# Altium PCB Arm_control_pull.PcbDoc
Units mm, origin at the board's own origin, x right, y up, seen from the top; angles counter-clockwise.
Board outline 234.6 x 140 mm, 2 copper layers (Top Layer, Bottom Layer); 37 components, 45 nets, 285 pads, 23 vias.
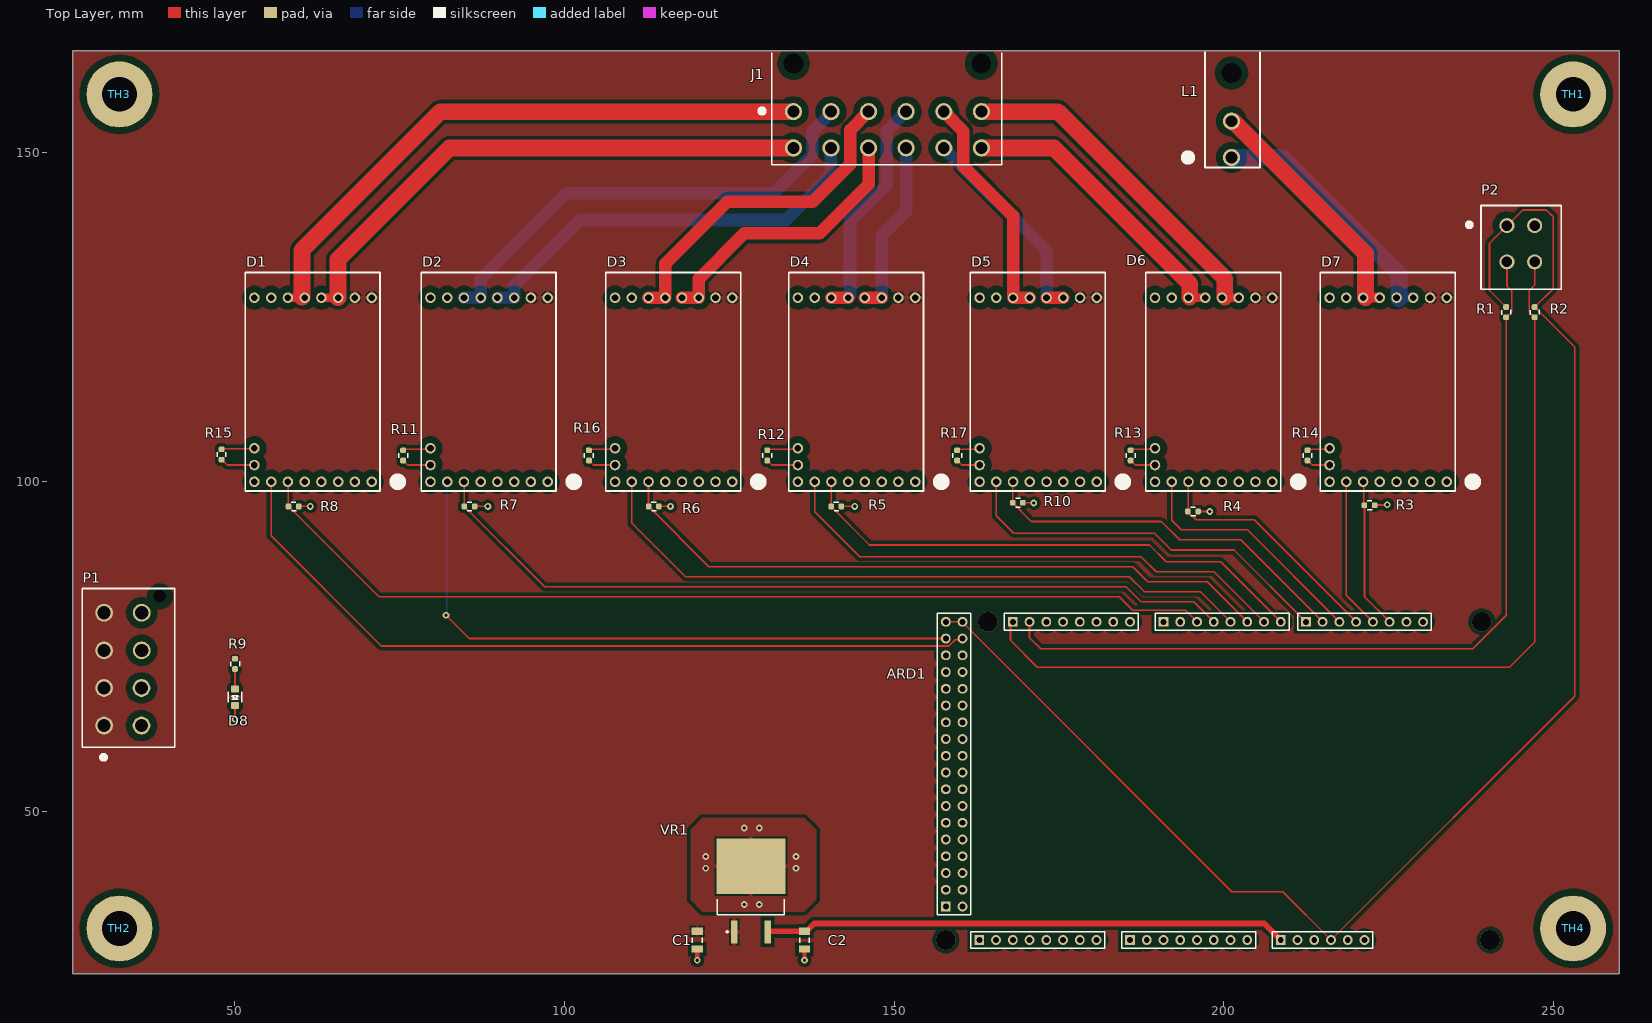
[diagram p0: Top Layer view]
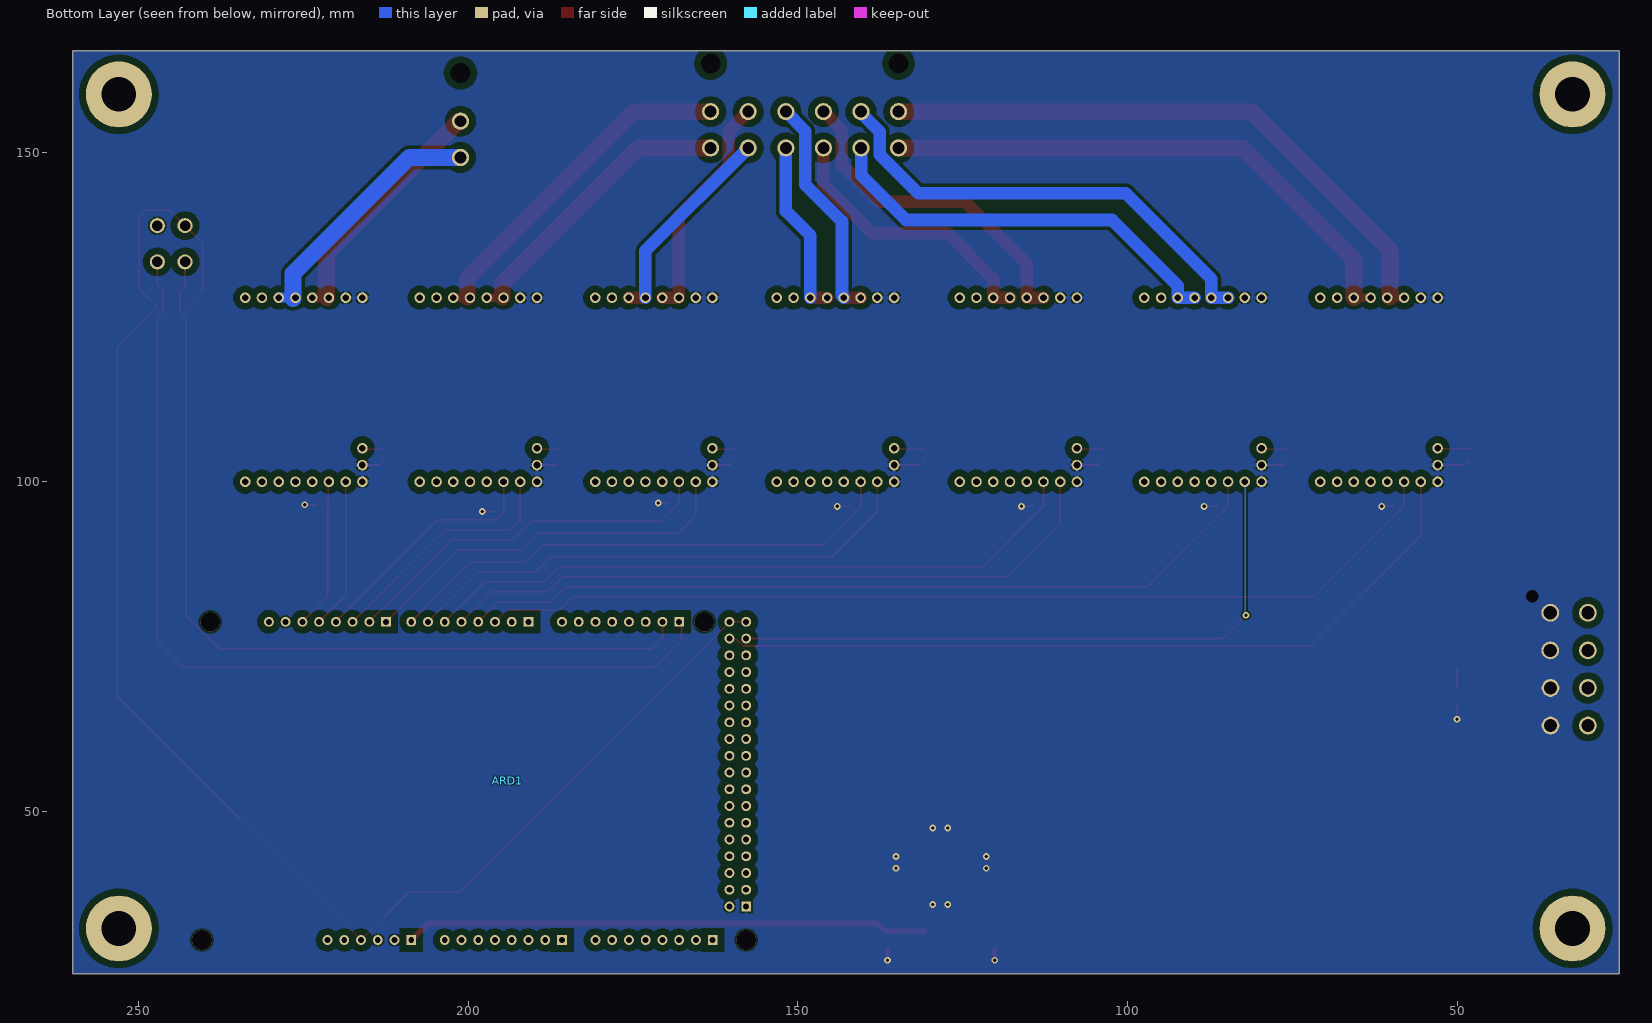
[diagram p1: Bottom Layer view, seen from below]

## Layer stack, top to bottom
Top Solder: solder mask 0.0102, Solder Resist, Dk 3.5
Top Layer: signal copper 0.0356
Dielectric 1: dielectric 0.32, FR-4, Dk 4.8
Bottom Layer: signal copper 0.0356
Bottom Solder: solder mask 0.0102, Solder Resist, Dk 3.5

## Board outline
25.4,25.4 25.4,165.4 260,165.4 260,25.4

## Design rules (kind name [scope] priority, off if disabled: settings)
BoardOutlineClearance [All] p1: gap=0.254 ignorepadtopadclearanceinfootprint=FALSE except(0: Arc-SplitContinuation Track-SplitContinuation SMDPad-SplitContinuation THPad-SplitContinuation Via-SplitContinuation Fill-SplitContinuation Poly-SplitContinuation Region-SplitContinuation Text-SplitContinuation; 0.127: Track-OutlineEdge SMDPad-OutlineEdge THPad-OutlineEdge Via-OutlineEdge Fill-OutlineEdge Poly-OutlineEdge Region-OutlineEdge Text-OutlineEdge)
Clearance 14.8VP_CLearance [InNet('14.8V') or InNet('OutA1') or  InNet('OutA2') or InNet('OutA3') or InNet('OutA4') or InNet('OutA5') or InNet('OutA6') or InNet('OutA7') or InNet('OutB1') or  InNet('OutB2') or InNet('OutB3') or InNet('OutB4') or InNet('OutB5') or InNet('OutB6') or InNet('OutB7')] p1: gap=0.508 ignorepadtopadclearanceinfootprint=TRUE except(0: Arc-Hole Track-Hole SMDPad-Hole THPad-Hole Via-Hole Fill-Hole Poly-Hole Region-Hole Text-Hole; 1.016: THPad-Poly)
Clearance [All] p2: gap=0.254 ignorepadtopadclearanceinfootprint=FALSE except(0: Arc-Hole Track-Hole SMDPad-Hole THPad-Hole Via-Hole Fill-Hole Poly-Hole Region-Hole Text-Hole; 1.016: THPad-Poly)
HoleSize [All] p1: absolutevalues=TRUE maxlimit=25.4 minlimit=0.025 maxpercent=80.000 minpercent=20.000
PolygonConnect Direct_Connect [InComponent('P1')] p1: connectstyle=Direct reliefconductorwidth=0.254 reliefentries=4 polygonreliefangle="90 Angle" airgapwidth=0.254
PolygonConnect Thick_Connect [InComponent('D1') or  InComponent('D2') or InComponent('D3') or InComponent('D4') or InComponent('D5') or InComponent('D6') or InComponent('D7') or InComponent('VR1')] p2: thpad.connectstyle=Relief thpad.reliefconductorwidth=0.635 thpad.reliefentries=4 thpad.polygonreliefangle="90 Angle" thpad.airgapwidth=0.254 smdpad.connectstyle=Relief smdpad.reliefconductorwidth=0.635 smdpad.reliefentries=4 smdpad.polygonreliefangle="90 Angle" smdpad.airgapwidth=0.254 via.connectstyle=Direct via.reliefconductorwidth=0.254 via.reliefentries=4 via.polygonreliefangle="90 Angle" via.airgapwidth=0.254
PolygonConnect [All] p3: thpad.connectstyle=Relief thpad.reliefconductorwidth=0.254 thpad.reliefentries=4 thpad.polygonreliefangle="90 Angle" thpad.airgapwidth=0.254 smdpad.connectstyle=Relief smdpad.reliefconductorwidth=0.254 smdpad.reliefentries=4 smdpad.polygonreliefangle="90 Angle" smdpad.airgapwidth=0.254 via.connectstyle=Direct via.reliefconductorwidth=0.254 via.reliefentries=4 via.polygonreliefangle="90 Angle" via.airgapwidth=0.254
RoutingVias [All] p1: holewidth=0.508 width=1.016 viastyle="Through Hole" minholewidth=0.381 minwidth=0.508 maxholewidth=1.27 maxwidth=1.524
SilkToSolderMaskClearance [IsPad] p1: minsilkscreentomaskgap=0.025 clearancetoexposedcopper=TRUE
SolderMaskExpansion [All] p1: expansion=0.102
Width [All] p1: maxlimit=2.54 minlimit=0.203 preferedwidth=0.254 minimp=50.000000 maximp=50.000000 favimp=50.000000
28 further rules are at their usual default settings.

## Classes and differential pairs
component class Arm_control_pull: D1 D2 D3 D4 D5 D6 D7 D8 J1 J? L1 M1 M2 M3 M4 M5 M6 M7 P1 R9 R11 R12 R13 R14 R15 R16 R17
component class ARD: ARD1 C1 C2 K? P2 R1 R2 R3 R4 R5 R6 R7 R8 R10 TH1 TH2 TH3 TH4 VR1

## Components (designator, comment, footprint, x,y, rotation, side; value= is the part's Value field where it differs from the comment)
ARD1 "Arduino Mega" "Arduino Mega" 201.016,55.905 r180 bottom
C1 "Cap Semi" C1206 120.142,30.48 r90 top value=100pF
C2 "Cap Semi" C1206 136.398,30.48 r90 top value=100pF
D1 "Pololu G2 High-Power Motor Driver 18v25" "POLOLU 18V25" 70.764,100 r180 top
D2 "Pololu G2 High-Power Motor Driver 18v25" "POLOLU 18V25" 97.46,100 r180 top
D3 "Pololu G2 High-Power Motor Driver 18v25" "POLOLU 18V25" 125.451,100 r180 top
D4 "Pololu G2 High-Power Motor Driver 18v25" "POLOLU 18V25" 153.187,100 r180 top
D5 "Pololu G2 High-Power Motor Driver 18v25" "POLOLU 18V25" 180.734,100 r180 top
D6 "Pololu G2 High-Power Motor Driver 18v25" "POLOLU 18V25" 207.341,100 r180 top
D7 "Pololu G2 High-Power Motor Driver 18v25" "POLOLU 18V25" 233.815,100 r180 top
D8 "Blue LED" LTST-C171TBKT 50.038,68.58 r270 top
J1 "172064-1012" 172064-1012 163.226,150.634 r180 top
L1 "0768250002" "MOLEX 0768250002" 201.168,149.186 r180 top
P1 "Mini-Fit Jr 8 Pos RA" "MOLEX 172065-0208" 34.417,72.822 r270 top
P2 "Mini-Fit Jr 4 Pos" "MOLEX 0039281043" 242.942,138.85 r0 top
R1 "Res1" RESC1608X06N_0603 242.824,125.73 r90 top value=4.7K
R2 "Res1" RESC1608X06N_0603 247.142,125.73 r90 top value=4.7K
R3 "Res1" RESC1608X06N_0603 222.098,96.444 r180 top value=1K
R4 "Res1" RESC1608X06N_0603 195.326,95.504 r180 top value=1K
R5 "Res1" RESC1608X06N_0603 141.224,96.266 r180 top value=1K
R6 "Res1" RESC1608X06N_0603 113.538,96.266 r180 top value=1K
R7 "Res1" RESC1608X06N_0603 85.598,96.266 r180 top value=1K
R8 "Res1" RESC1608X06N_0603 58.928,96.266 r180 top value=1K
R9 "Res1" RESC1608X06N_0603 50.038,72.377 r270 top value=2.7k
R10 "Res1" RESC1608X06N_0603 168.758,96.825 r180 top value=1K
R11 "Res1" RESC1608X06N_0603 75.54,104 r90 top value=50K
R12 "Res1" RESC1608X06N_0603 130.759,104 r90 top value=50K
R13 "Res1" RESC1608X06N_0603 185.877,104 r90 top value=50K
R14 "Res1" RESC1608X06N_0603 212.7,104 r90 top value=50K
R15 "Res1" RESC1608X06N_0603 48.006,104.14 r90 top value=50K
R16 "Res1" RESC1608X06N_0603 103.708,104 r90 top value=50K
R17 "Res1" RESC1608X06N_0603 159.563,104 r90 top value=50K
TH1 "M5-Screw-Hole" M5_Screw_Hole#1 252.984,158.75 r0 top
TH2 "M5-Screw-Hole" M5_Screw_Hole#2 32.512,32.004 r0 top
TH3 "M5-Screw-Hole" M5_Screw_Hole#3 32.766,158.75 r0 top
TH4 "M5-Screw-Hole" M5_Screw_Hole#1 252.984,32.258 r0 top
VR1 "Volt Reg" DPAK254P1420X457-3N 128.27,37.85 r90 top

## Footprints (in the part's own frame and the unit in brackets; to place one, negate y for a bottom-side part, rotate by r counter-clockwise, add the part's x,y. Pads: shape width x height; smd on the part's side, far side on the other; paste and mask are expansions set on the pad)
172064-1012 [mm] "Connector Header Through Hole, Right Angle 12 position 0.224\" (5.70mm)"
  round 2.6 hole 1.8: 1(28.5,-5.5) 2(22.8,-5.5) 3(17.1,-5.5) 4(11.4,-5.5) 5(5.7,-5.5) 6(0,-5.5) 7(28.5,0) 8(22.8,0) 9(17.1,0) 10(11.4,0) 11(5.7,0) 12(0,0)
  round 2.6 hole 3 unplated: M1(0,-12.8) M1(28.5,-12.8)
  silkscreen extent -3.11,-14.47 33.53,2.54, body extent -3.11,-21.39 31.75,0.57, height 14.55
"Arduino Mega" [mm] "Arduino Mega 2560"
  rect 1.5x1.5 hole 0.9: 0(10.16,22.86) 8(-11.43,22.86) 21(33.02,22.86) 59(-7.62,-25.4) 67(15.24,-25.4) 75(38.1,-25.4) 79(43.18,-20.32)
  round 1.5 hole 0.9: 1(7.62,22.86) 2(5.08,22.86) 3(2.54,22.86) 4(0,22.86) 5(-2.54,22.86) 6(-5.08,22.86) 7(-7.62,22.86) 9(-13.97,22.86) 10(-16.51,22.86) 11(-19.05,22.86) 12(-21.59,22.86) 13(-24.13,22.86) 14(15.24,22.86) 15(17.78,22.86) 16(20.32,22.86) 17(22.86,22.86) 18(25.4,22.86) 19(27.94,22.86) 20(30.48,22.86) 22(40.64,20.32) 23(43.18,20.32) 24(40.64,17.78) 25(43.18,17.78) 26(40.64,15.24) 27(43.18,15.24) 28(40.64,12.7) 29(43.18,12.7) 30(40.64,10.16) 31(43.18,10.16) 32(40.64,7.62) 33(43.18,7.62) 34(40.64,5.08) 35(43.18,5.08) 36(40.64,2.54) 37(43.18,2.54) 38(40.64,0) 39(43.18,0) 40(40.64,-2.54) 41(43.18,-2.54) 42(40.64,-5.08) 43(43.18,-5.08) 44(40.64,-7.62) 45(43.18,-7.62) 46(40.64,-10.16) 47(43.18,-10.16) 48(40.64,-12.7) 49(43.18,-12.7) 50(40.64,-15.24) 51(43.18,-15.24) 52(40.64,-17.78) 53(43.18,-17.78) 54(-20.32,-25.4) 55(-17.78,-25.4) 56(-15.24,-25.4) 57(-12.7,-25.4) 58(-10.16,-25.4) 60(-2.54,-25.4) 61(0,-25.4) 62(2.54,-25.4) 63(5.08,-25.4) 64(7.62,-25.4) 65(10.16,-25.4) 66(12.7,-25.4) 68(20.32,-25.4) 69(22.86,-25.4) 70(25.4,-25.4) 71(27.94,-25.4) 72(30.48,-25.4) 73(33.02,-25.4) 74(35.56,-25.4) 76(-26.67,22.86) 77(-29.21,22.86) 78(40.64,-20.32) 80(43.18,22.86) 81(40.64,22.86)
C1206 [mm] "Chip Capacitor, Body 3.2x1.6mm, IPC High Density"
  rect 1.1x1.7 smd: 1(-1.35,0) 2(1.35,0)
  silkscreen extent -0.4,-0.75 0.4,0.75, body extent -1.7,-0.9 1.7,0.9, height 1.3
DPAK254P1420X457-3N [mm] "D2-PAK, 3-Pads, Body 7.77x8.48mm (max), IPC Medium Density"
  rect 3.504x1 smd: 1(-6.1,2.54) 3(-6.1,-2.54)
  rect 8.38x10.49 smd: 2(3.85,0)
  silkscreen extent -6.22,-5.1 -1.14,5.1, body extent -6.71,-5.13 7.48,5.13, height 4.83
LTST-C171TBKT [mm]
  rrect50% 1.1x1.25 smd paste+0: 1(0,0) 2(2.5,0)
  silkscreen extent 0.46,-1.02 1.98,1.02
M5_Screw_Hole#1 [mm]
  round 10 hole 5.25 mask+0.2: 1(0,0)
M5_Screw_Hole#2 [mm]
  round 10 hole 5.25 mask+0.2: 1(0,0.254)
M5_Screw_Hole#3 [mm]
  round 10 hole 5.25 mask+0.2: 1(-0.254,0)
"MOLEX 172065-0208" [mm] "Connector Header Through Hole 8 position 0.224\" (5.70mm)"
  round 2.7 hole 2: 1(9.79,-4.236) 2(4.09,-4.236) 3(-1.61,-4.236) 4(-7.31,-4.236) 5(9.79,1.439) 6(4.09,1.439) 7(-1.61,1.464) 8(-7.31,1.464)
  round 0 hole 1.9: 6(-9.79,4.236)
  silkscreen extent -10.98,-7.56 14.97,6.49, body extent -10.5,-7.54 12.96,6.49, height 15.61
"MOLEX 0039281043" [mm] "Connector Header Through Hole 4 position 0.165\" (4.20mm)"
  round 2.3 hole 1.6: 1(0,0) 2(4.2,0) 3(0,-5.5) 4(4.2,-5.5)
  silkscreen extent -6.08,-9.65 8.25,3.05, body extent -3.07,-8.82 7.33,2.18, height 3.5
"MOLEX 0768250002" [mm]
  round 2.6 hole 1.8: 1(0,0) 2(0,-5.5)
  round 2.6 hole 3: ""(0,-12.8)
  silkscreen extent -4.32,-15.91 7.11,1.52, body extent -4.32,-21.39 4.03,0.57, height 14.05
"POLOLU 18V25" [mm]
  round 1.6 hole 1 paste+0: 1(17.78,0) 2(15.24,0) 3(12.7,0) 5(7.62,0) 6(5.08,0) 7(2.54,0) 10(17.78,-5.08) 11(15.24,-27.92) 11(17.78,-27.92) 12(12.7,-27.92) 13(5.08,-27.92) 13(7.62,-27.92) 14(2.54,-27.92)
  round 1.6 hole 1: 4(10.16,0) 8(0,0) 9(17.78,-2.54) 12(10.16,-27.92) 14(0,-27.92)
  silkscreen extent -4.12,-31.75 19.18,1.4, body extent -1.27,-31.72 19.05,1.3, height 9.57
RESC1608X06N_0603 [mm] "Chip Resistor, 2-Leads, Body 1.60x0.80mm, IPC Medium Density"
  rrect50% 0.85x0.9 smd: 1(-0.775,0) 2(0.775,0)
  silkscreen extent -0.38,-0.66 0.34,0.69, body extent -0.85,-0.45 0.85,0.45, height 0.55

## Part data
C1 C2: "Capacitor (Semiconductor SIM Model)", LatestRevisionDate=29-May-2009, LatestRevisionNote="IPC-7351 Footprint Added.", PackageDescription="Chip Capacitor", PackageReference=C1206, Published=8-Jun-2000, Publisher="Altium Limited"
J1: "Conn Shrouded Header HDR 12 POS 5.7mm Solder RA Thru-Hole Tray", Color=Black, Manufacturer 1="Molex Waldom", Max Operating Temperature=120°C, Min Operating Temperature=-40°C, Supplier Part Number 1=WM11214-ND, Category=Connectors, ComponentLink1Description=http://www.molex.com/pdm_docs/ps/PS-76823-100.pdf?src-supplier=Digi-Key, ComponentLink1URL=http://www.molex.com/pdm_docs/ps/PS-76823-100.pdf?src-supplier=Digi-Key, ComponentLink2Description=http://www.molex.com/pdm_docs/sd/1720641004_sd.pdf?src-supplier=Avnet, ComponentLink2URL=http://www.molex.com/pdm_docs/sd/1720641004_sd.pdf?src-supplier=Avnet, Connector Type="Male Pin", Contact Plating=Gold, Fastening Type=Ramp, Glow Wire Compliant=Compliant, Halogen Free="Low Halogen", Manufacturer Part Number 1=172064-1012, Mount="Through Hole", Number of Circuits=12, Number of Contacts=12, Number of Positions=12, Number of Rows=2, Orientation="Right Angle", Packaging=Tray, Pitch=5.7mm, Pricing 1="1=16.34000, 10=14.85400, 100=12.62590, 500=10.76916, 1000=9.87791 (USD)", RoHS=Yes, Row Spacing=0.224inch, Stock 1=343, Supplier 1=Digi-Key, Termination=Solder
L1: "Conn Power HDR 2 POS 5.7mm Solder RA Thru-Hole 2 Terminal 1 Port", Color=Black, Manufacturer 1=Molex, Supplier Part Number 1=WM11969-ND, Category=Connectors, ComponentLink1Description=https://www.molex.com/pdm_docs/sd/768250002_sd.pdf?src-supplier=Digi-Key, ComponentLink1URL=https://www.molex.com/pdm_docs/sd/768250002_sd.pdf?src-supplier=Digi-Key, Connector Type="Male Pin", Contact Plating=Tin, Fastening Type=Ramp, Manufacturer Part Number 1=0768250002, Mount="Through Hole", Number of Positions=2, Number of Rows=2, Packaging=Tray, Pricing 1="1=1.13000, 10=0.99300, 25=0.93440, 50=0.89560, 100=0.85670, 250=0.77880, 500=0.70092, 2016=0.58410, 4032=0.56463 (USD)", RoHS=Yes, Row Spacing=0.224inch, Stock 1=2157, Supplier 1=Digi-Key, Termination=Solder
P1: library part "Molex Mega-Fit 8pos Vert"
P2: library part "Molex 0039281043", "Mini-Fit Jr. Header, Dual Row, Right-Angle, with Snap-in Plastic Peg PCB Lock, 6 Circuits, PA Polyamide Nylon 6/6 94V-2, 0.76µm Select Gold (Au) Plating"
R1 R2 R3 R4 R5 R6 R7 R8 R9 R10 R11 R12 R13 R14 R15 R16 R17: "Resistor", LatestRevisionDate=17-Jul-2002, LatestRevisionNote="Re-released for DXP Platform.", PackageDescription="Axial Device, Thru-Hole; 2 Leads; 0.3 in Pin Spacing", PackageReference=AXIAL-0.3, Published=8-Jun-2000, Publisher="Altium Limited"
VR1: "Voltage Regulator", LatestRevisionDate=29-May-2009, LatestRevisionNote="IPC-7351 Footprint Added.", PackageDescription="3-Pin Transistor Outline Package 2.54 mm Pitch, 15.1 mm Lead Span", PackageReference=D2PAK, Published=24-Mar-1999, Publisher="Altium Limited"
D1 D2 D3 D4 D5 D6 D7: Category="Brushed DC motor"

## Via types
v1: diameter 1.016, hole 0.508, Top Layer to Bottom Layer, tented both sides, 19 vias
v2: diameter 3, hole 3, Top Layer to Bottom Layer, 4 vias

## Nets (pads, with @x,y where several pads share a name; then routed paths per layer and width w, separated by ;. In a path a pad name is that pad's centre, name@x,y a point inside that pad or via, vN(x,y) a via of type N, cw(c..) or ccw(c..) an arc to the next point about the centre after c; other vN are vias at no path point)
3V3: ARD1.55
5V: ARD1.56 ARD1.80 ARD1.81 P2.1 R1.2 R2.2 | length 230.1
  Top Layer w0.254: ARD1.80 ARD1.81 160.376,78.682 201.212,37.846 208.915,37.846 ARD1.56 253.238,67.488 253.238,120.434 R2.2@247.167,126.505 ; R1.2 242.799,126.505 240.284,129.02 240.284,136.192 P2.1 245.316,141.224 248.92,141.224 249.936,140.208 249.936,129.274 R2.2@247.167,126.505 ; R2.2 R2.2@247.167,126.505
14.8V: C1.2 D1.14 D2.14 D3.14 D4.14 D5.14 D6.14 D7.14 P1.1 P1.2 P1.3 P1.4 R9.1 VR1.1
ARD_VIN: ARD1.59 C2.2 VR1.3 | length 79.4
  Top Layer w0.889: VR1.3 130.89,31.83 C2.2 136.698,31.83 137.888,33.02 206.121,33.02 ARD1.59
GND: ARD1.57 ARD1.58 ARD1.76 ARD1.78 ARD1.79 C1.1 C2.1 D1.1 D1.9 D1.11 D2.1 D2.9 D2.11 D3.1 D3.9 D3.11 D4.1 D4.9 D4.11 D5.1 D5.9 D5.11 D6.1 D6.9 D6.11 D7.1 D7.9 D7.11 D8.2 P1.5 P1.6 P1.7 P1.8 P2.2 R3.1 R4.1 R5.1 R6.1 R7.1 R8.1 R10.1 R11.1 R12.1 R13.1 R14.1 R15.1 R16.1 R17.1 VR1.2 | length 48.6
  Top Layer w0.254: R15.1 48.031,103.365 48.856,102.54 D1.9 ; v1(50.038,64.008) D8.2 ; R8.1 v1(61.468,96.266) ; R11.1 75.565,103.225 76.25,102.54 D2.9 ; R7.1 v1(88.392,96.266) ; R16.1 103.733,103.225 104.418,102.54 D3.9 ; R6.1 v1(116.078,96.266) ; R12.1 130.784,103.225 131.469,102.54 D4.9 ; R5.1 v1(144.018,96.266) ; R17.1 159.588,103.225 160.273,102.54 D5.9 ; R10.1 169.558,96.799 171.171,96.799 v1(171.196,96.774) ; R13.1 185.902,103.225 186.587,102.54 D6.9 ; R4.1 v1(197.866,95.504) ; R14.1 212.725,103.225 213.41,102.54 D7.9 ; R3.1 222.911,96.482 224.752,96.482 v1(224.79,96.52)
  Top Layer w0.635: v1(120.142,27.432) C1.1 ; v1(136.398,27.432) C2.1
  other v1: 127.254,35.902 129.54,35.902 121.412,41.402 135.128,41.402 121.412,43.18 135.128,43.18 127.254,47.498 129.54,47.498
NetARD1_2: ARD1.2 D1.3 R8.2 | length 148.8
  Top Layer w0.254: D1.3 58.109,99.956 58.109,96.31 R8.2 71.869,82.55 184.15,82.55 186.182,80.518 194.183,80.518 ARD1.2
NetARD1_3: ARD1.3 D2.3 R7.2 | length 124.7
  Top Layer w0.254: D2.3 84.791,99.968 84.791,96.298 R7.2 84.823,96.241 96.99,84.074 185.166,84.074 187.452,81.788 195.453,81.788 ARD1.3
NetARD1_4: ARD1.4 D3.2 | length 103.3
  Top Layer w0.254: D3.2 110.211,93.751 118.364,85.598 185.674,85.598 187.96,83.312 196.469,83.312 ARD1.4
NetARD1_5: ARD1.5 D3.3 R6.2 | length 101.8
  Top Layer w0.254: D3.3 112.757,99.994 112.757,96.272 R6.2 121.907,87.122 186.182,87.122 188.468,84.836 197.485,84.836 ARD1.5
NetARD1_6: ARD1.6 D4.2 | length 79.6
  Top Layer w0.254: D4.2 137.947,95.479 144.78,88.646 187.452,88.646 189.738,86.36 198.501,86.36 ARD1.6
NetARD1_7: ARD1.7 D4.3 R5.2 | length 79.2
  Top Layer w0.254: D4.3 140.487,96.304 R5.2 140.449,96.241 146.266,90.424 188.722,90.424 191.262,87.884 199.517,87.884 ARD1.7
NetARD1_8: ARD1.8 D5.2 | length 58.8
  Top Layer w0.254: D5.2 165.494,94.856 168.148,92.202 189.484,92.202 192.024,89.662 201.549,89.662 ARD1.8
NetARD1_9: ARD1.9 D5.3 R10.2 | length 57.7
  Top Layer w0.254: D5.3 168.008,99.974 168.008,96.85 R10.2 167.983,96.8 170.802,93.98 190.5,93.98 193.294,91.186 202.565,91.186 ARD1.9
NetARD1_10: ARD1.10 D6.2 | length 37.6
  Top Layer w0.254: D6.2 192.101,94.157 193.548,92.71 203.581,92.71 ARD1.10
NetARD1_11: ARD1.11 D6.3 R4.2 | length 37
  Top Layer w0.254: D6.3 194.596,99.955 194.596,95.549 R4.2 194.551,95.479 195.796,94.234 204.597,94.234 ARD1.11
NetARD1_12: ARD1.12 D7.2 | length 22.9
  Top Layer w0.254: D7.2 218.575,82.796 ARD1.12
NetARD1_13: ARD1.13 D7.3 R3.2 | length 22.9
  Top Layer w0.254: D7.3 221.219,99.896 221.219,96.548 R3.2 221.323,82.588 ARD1.13
NetARD1_14: ARD1.14
NetARD1_15: ARD1.15
NetARD1_22: ARD1.22 D1.2 | length 120.4
  Top Layer w0.254: D1.2 55.524,91.796 72.226,75.094 158.304,75.094 159.245,76.035 160.185,76.035 ARD1.22
NetARD1_23: ARD1.23 D2.2 | length 97.6
  Top Layer w0.254: v1(82.042,79.756) 85.573,76.225 ARD1.23
  Bottom Layer w0.254: v1(82.042,79.756) 82.131,79.845 82.131,99.911 D2.2
NetD1_10: D1.10 R15.2 | length 5
  Top Layer w0.254: R15.2 48.088,104.997 52.902,104.997 D1.10
NetD2_10: D2.10 R11.2 | length 4.3
  Top Layer w0.254: R11.2 75.692,104.927 79.527,104.927 D2.10
NetD3_10: D3.10 R16.2 | length 4.1
  Top Layer w0.254: R16.2 103.861,104.927 107.518,104.927 D3.10
NetD4_10: D4.10 R12.2 | length 4.8
  Top Layer w0.254: R12.2 130.912,104.927 135.255,104.927 D4.10
NetD5_10: D5.10 R17.2 | length 3.5
  Top Layer w0.254: R17.2 159.715,104.927 162.801,104.927 D5.10
NetD6_10: D6.10 R13.2 | length 3.8
  Top Layer w0.254: R13.2 186.03,104.927 189.408,104.927 D6.10
NetD7_10: D7.10 R14.2 | length 3.5
  Top Layer w0.254: R14.2 212.852,104.927 215.882,104.927 D7.10
NetD8_1: D8.1 R9.2 | length 3
  Top Layer w0.254: D8.1 R9.2
OutA1: D1.13 J1.7 | length 84.4
  Top Layer w1.27: D1.13@63.144,127.92 D1.13@65.646,127.92
  Top Layer w2.54: D1.13@65.646,127.92 65.646,133.718 82.562,150.634 J1.7
OutA2: D2.13 J1.8 | length 63.5
  Bottom Layer w1.905: D2.13@89.84,127.92 92.38,127.92 92.38,129.718 102.362,139.7 133.604,139.7 140.38,146.476 140.38,150.588 J1.8
OutA3: D3.13 J1.9 | length 42.6
  Top Layer w1.905: D3.13@117.831,127.92 120.371,127.92 120.371,130.785 127.254,137.668 138.684,137.668 146.126,145.11 J1.9
OutA4: D4.13 J1.10 | length 26.8
  Top Layer w1.905: D4.13@145.567,127.92 D4.13@148.107,127.92
  Bottom Layer w1.905: D4.13@148.107,127.92 148.107,137.323 151.826,141.042 J1.10
OutA5: D5.13 J1.11 | length 31.7
  Top Layer w1.905: D5.13@173.114,127.92 D5.13@175.654,127.92
  Bottom Layer w1.905: J1.11 173.114,135.046 D5.13@173.114,127.92
OutA6: D6.13 J1.6 | length 52.7
  Top Layer w1.27: D6.13@199.721,127.92 D6.13@202.261,127.92
  Top Layer w2.54: J1.6 174.828,156.134 200.152,130.81 D6.13@200.152,128.016
OutA7: D7.13 L1.1 | length 39
  Bottom Layer w1.524: D7.13@226.195,127.92 226.568,127.92 D7.13@228.735,127.92
  Bottom Layer w2.54: L1.1 208.954,149.186 226.568,131.572 226.568,127.92 D7.13@226.568,127.762
OutB1: D1.12 J1.1 | length 92.9
  Top Layer w1.27: D1.12@58.064,127.92 D1.12@60.604,127.92
  Top Layer w2.54: D1.12@60.198,128.016 60.198,135.128 81.204,156.134 J1.1
OutB2: D2.12 J1.2 | length 71.2
  Bottom Layer w1.905: D2.12@84.76,127.92 87.3,127.92 87.3,130.734 100.33,143.764 131.76,143.764 137.599,149.603 137.599,153.119 140.426,155.946 J1.2
OutB3: D3.12 J1.3 | length 51.1
  Top Layer w1.905: D3.12@112.751,127.92 115.291,127.92 115.316,127.945 115.316,133.096 124.714,142.494 137.668,142.494 143.366,148.192 143.366,153.373 J1.3
OutB4: D4.12 J1.4 | length 34.4
  Top Layer w1.905: D4.12@140.487,127.92 D4.12@143.027,127.92
  Bottom Layer w1.905: D4.12@143.027,127.92 143.307,128.199 143.307,139.497 148.887,145.077 148.887,153.194 J1.4
OutB5: D5.12 J1.5 | length 35.1
  Top Layer w1.905: J1.5 160.466,153.194 160.466,147.89 168.034,140.322 168.034,127.92 D5.12@170.574,127.92
OutB6: D6.12 J1.12 | length 44.7
  Top Layer w1.27: D6.12@194.641,127.92 D6.12@197.181,127.92
  Top Layer w2.54: J1.12 174.232,150.634 194.818,130.048 D6.12@194.818,128.016
OutB7: D7.12 L1.2 | length 37.9
  Top Layer w1.524: D7.12@221.115,127.92 221.488,127.92 D7.12@223.655,127.92
  Top Layer w2.54: L1.2 201.301,154.553 201.555,154.553 221.488,134.62 D7.12@221.488,127.92
SCL: ARD1.21 P2.4 R2.1 | length 144.3
  Top Layer w0.254: ARD1.21 167.64,78.41 167.64,75.946 171.704,71.882 243.332,71.882 247.142,75.692 R2.1 247.117,124.955 246.311,125.761 246.311,129.006 247.142,129.837 247.142,133.223 P2.4 P2.4@247.269,133.223
SDA: ARD1.20 P2.3 R1.1 | length 131.8
  Top Layer w0.254: ARD1.20 170.536,76.352 172.212,74.676 237.744,74.676 242.824,79.756 R1.1 242.849,124.955 243.655,125.761 243.655,128.945 242.942,129.658 P2.3 P2.3@242.889,133.297
pads on no net: ARD1.0 ARD1.1 ARD1.16 ARD1.17 ARD1.18 ARD1.19 ARD1.24 ARD1.25 ARD1.26 ARD1.27 ARD1.28 ARD1.29 ARD1.30 ARD1.31 ARD1.32 ARD1.33 ARD1.34 ARD1.35 ARD1.36 ARD1.37 ARD1.38 ARD1.39 ARD1.40 ARD1.41 ARD1.42 ARD1.43 ARD1.44 ARD1.45 ARD1.46 ARD1.47 ARD1.48 ARD1.49 ARD1.50 ARD1.51 ARD1.52 ARD1.53 ARD1.54 ARD1.60 ARD1.61 ARD1.62 ARD1.63 ARD1.64 ARD1.65 ARD1.66 ARD1.67 ARD1.68 ARD1.69 ARD1.70 ARD1.71 ARD1.72 ARD1.73 ARD1.74 ARD1.75 ARD1.77 D1.4 D1.5 D1.6 D1.7 D1.8 D2.4 D2.5 D2.6 D2.7 D2.8 D3.4 D3.5 D3.6 D3.7 D3.8 D4.4 D4.5 D4.6 D4.7 D4.8 D5.4 D5.5 D5.6 D5.7 D5.8 D6.4 D6.5 D6.6 D6.7 D6.8 D7.4 D7.5 D7.6 D7.7 D7.8 J1.M1 L1. TH1.1 TH2.1 TH3.1 TH4.1
copper on no net:
  other v2: 157.836,30.505 240.386,30.505 164.186,78.765 239.116,78.765

## Polygon pours and split planes (outlines as drawn)
14.8V on Top Layer "Top Layer-No Net1" (solid, remove dead copper, pour order 3): 25.4,25.4 25.4,165.4 260,165.4 260,25.4
GND on Top Layer "Top Layer-GND" (solid, remove dead copper, pour order 1): 136.398,49.022 120.904,49.022 119.126,47.244 119.126,36.576 120.904,34.798 136.398,34.798 138.176,36.576 138.176,47.244
GND on Bottom Layer "Top Layer-No Net" (solid, remove dead copper, pour order 0): 25.4,25.4 25.4,165.4 260,165.4 260,25.4

## Silkscreen, mask and mechanical layers (free items; w line width, h text height)
Mechanical 1:
  the board outline again, w0.2